# Altium PCB ArtFire.PcbDoc
Units mil, origin at the board's own origin, x right, y up, seen from the top; angles counter-clockwise.
Board outline 4250 x 3350 mil, 2 copper layers (Top Layer, Bottom Layer); 172 components, 120 nets, 589 pads, 1 vias.
Unrouted connection lines stored in the file: 371.
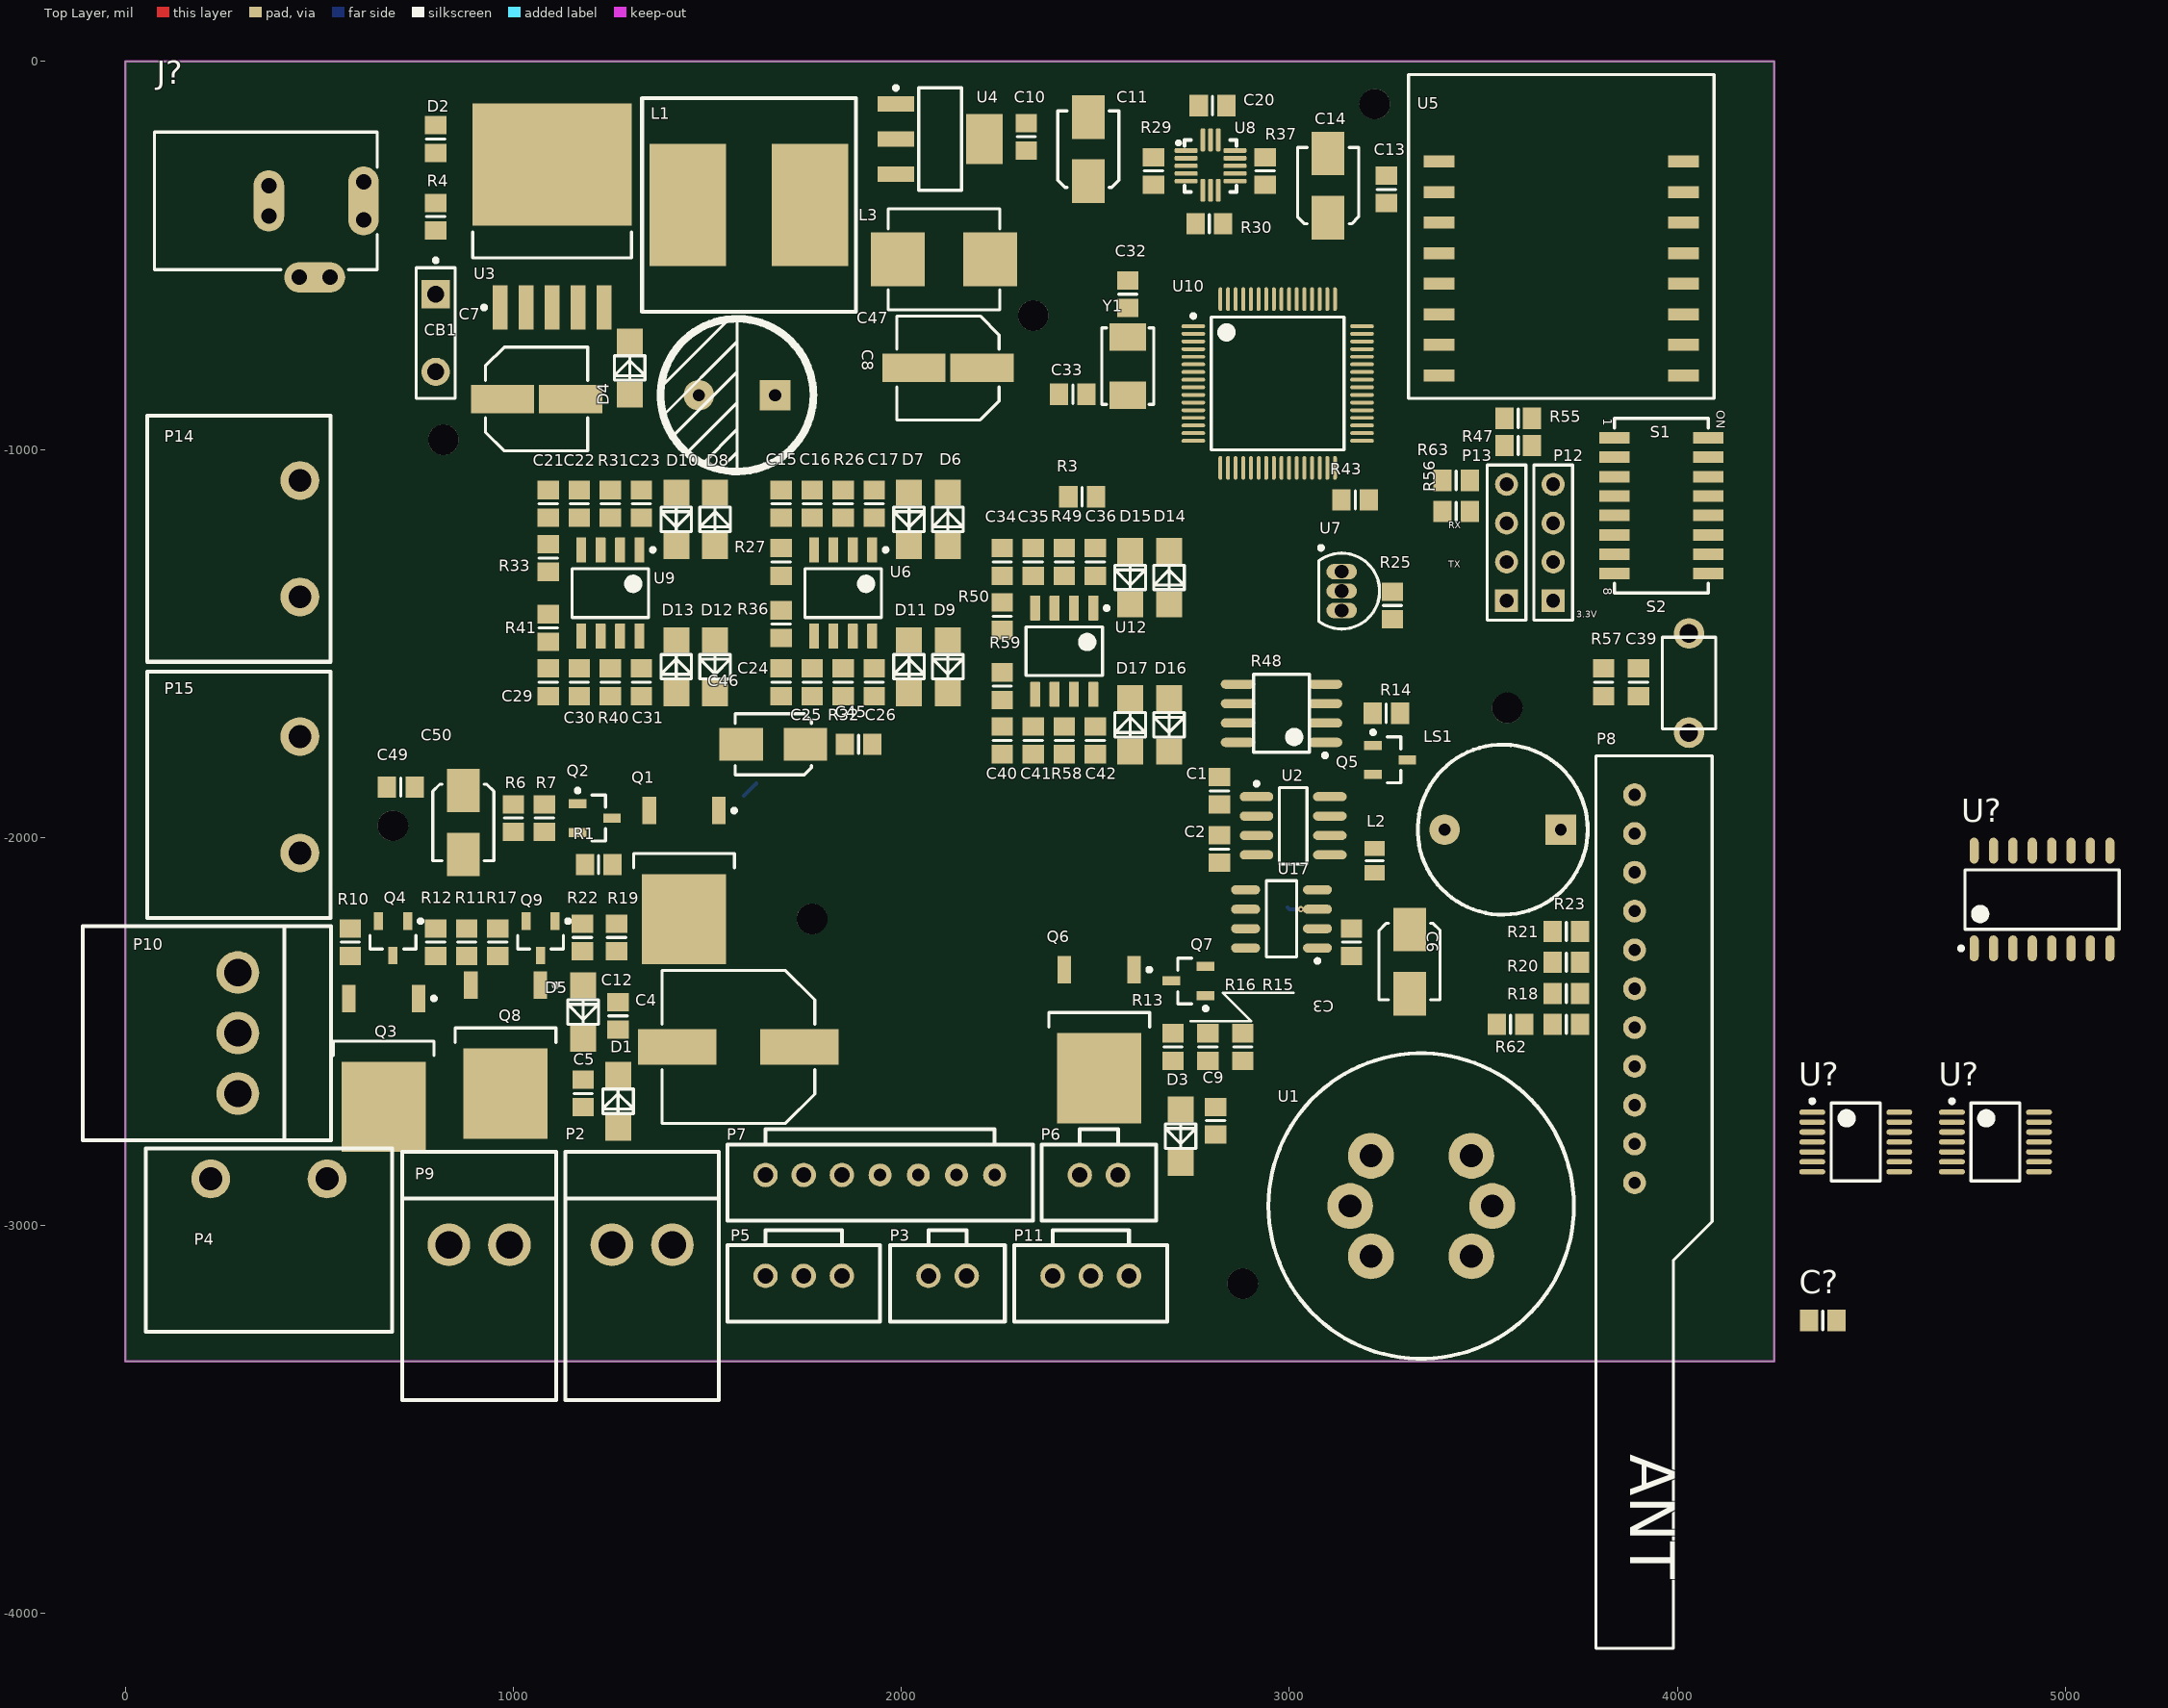
[diagram p0: Top Layer view]
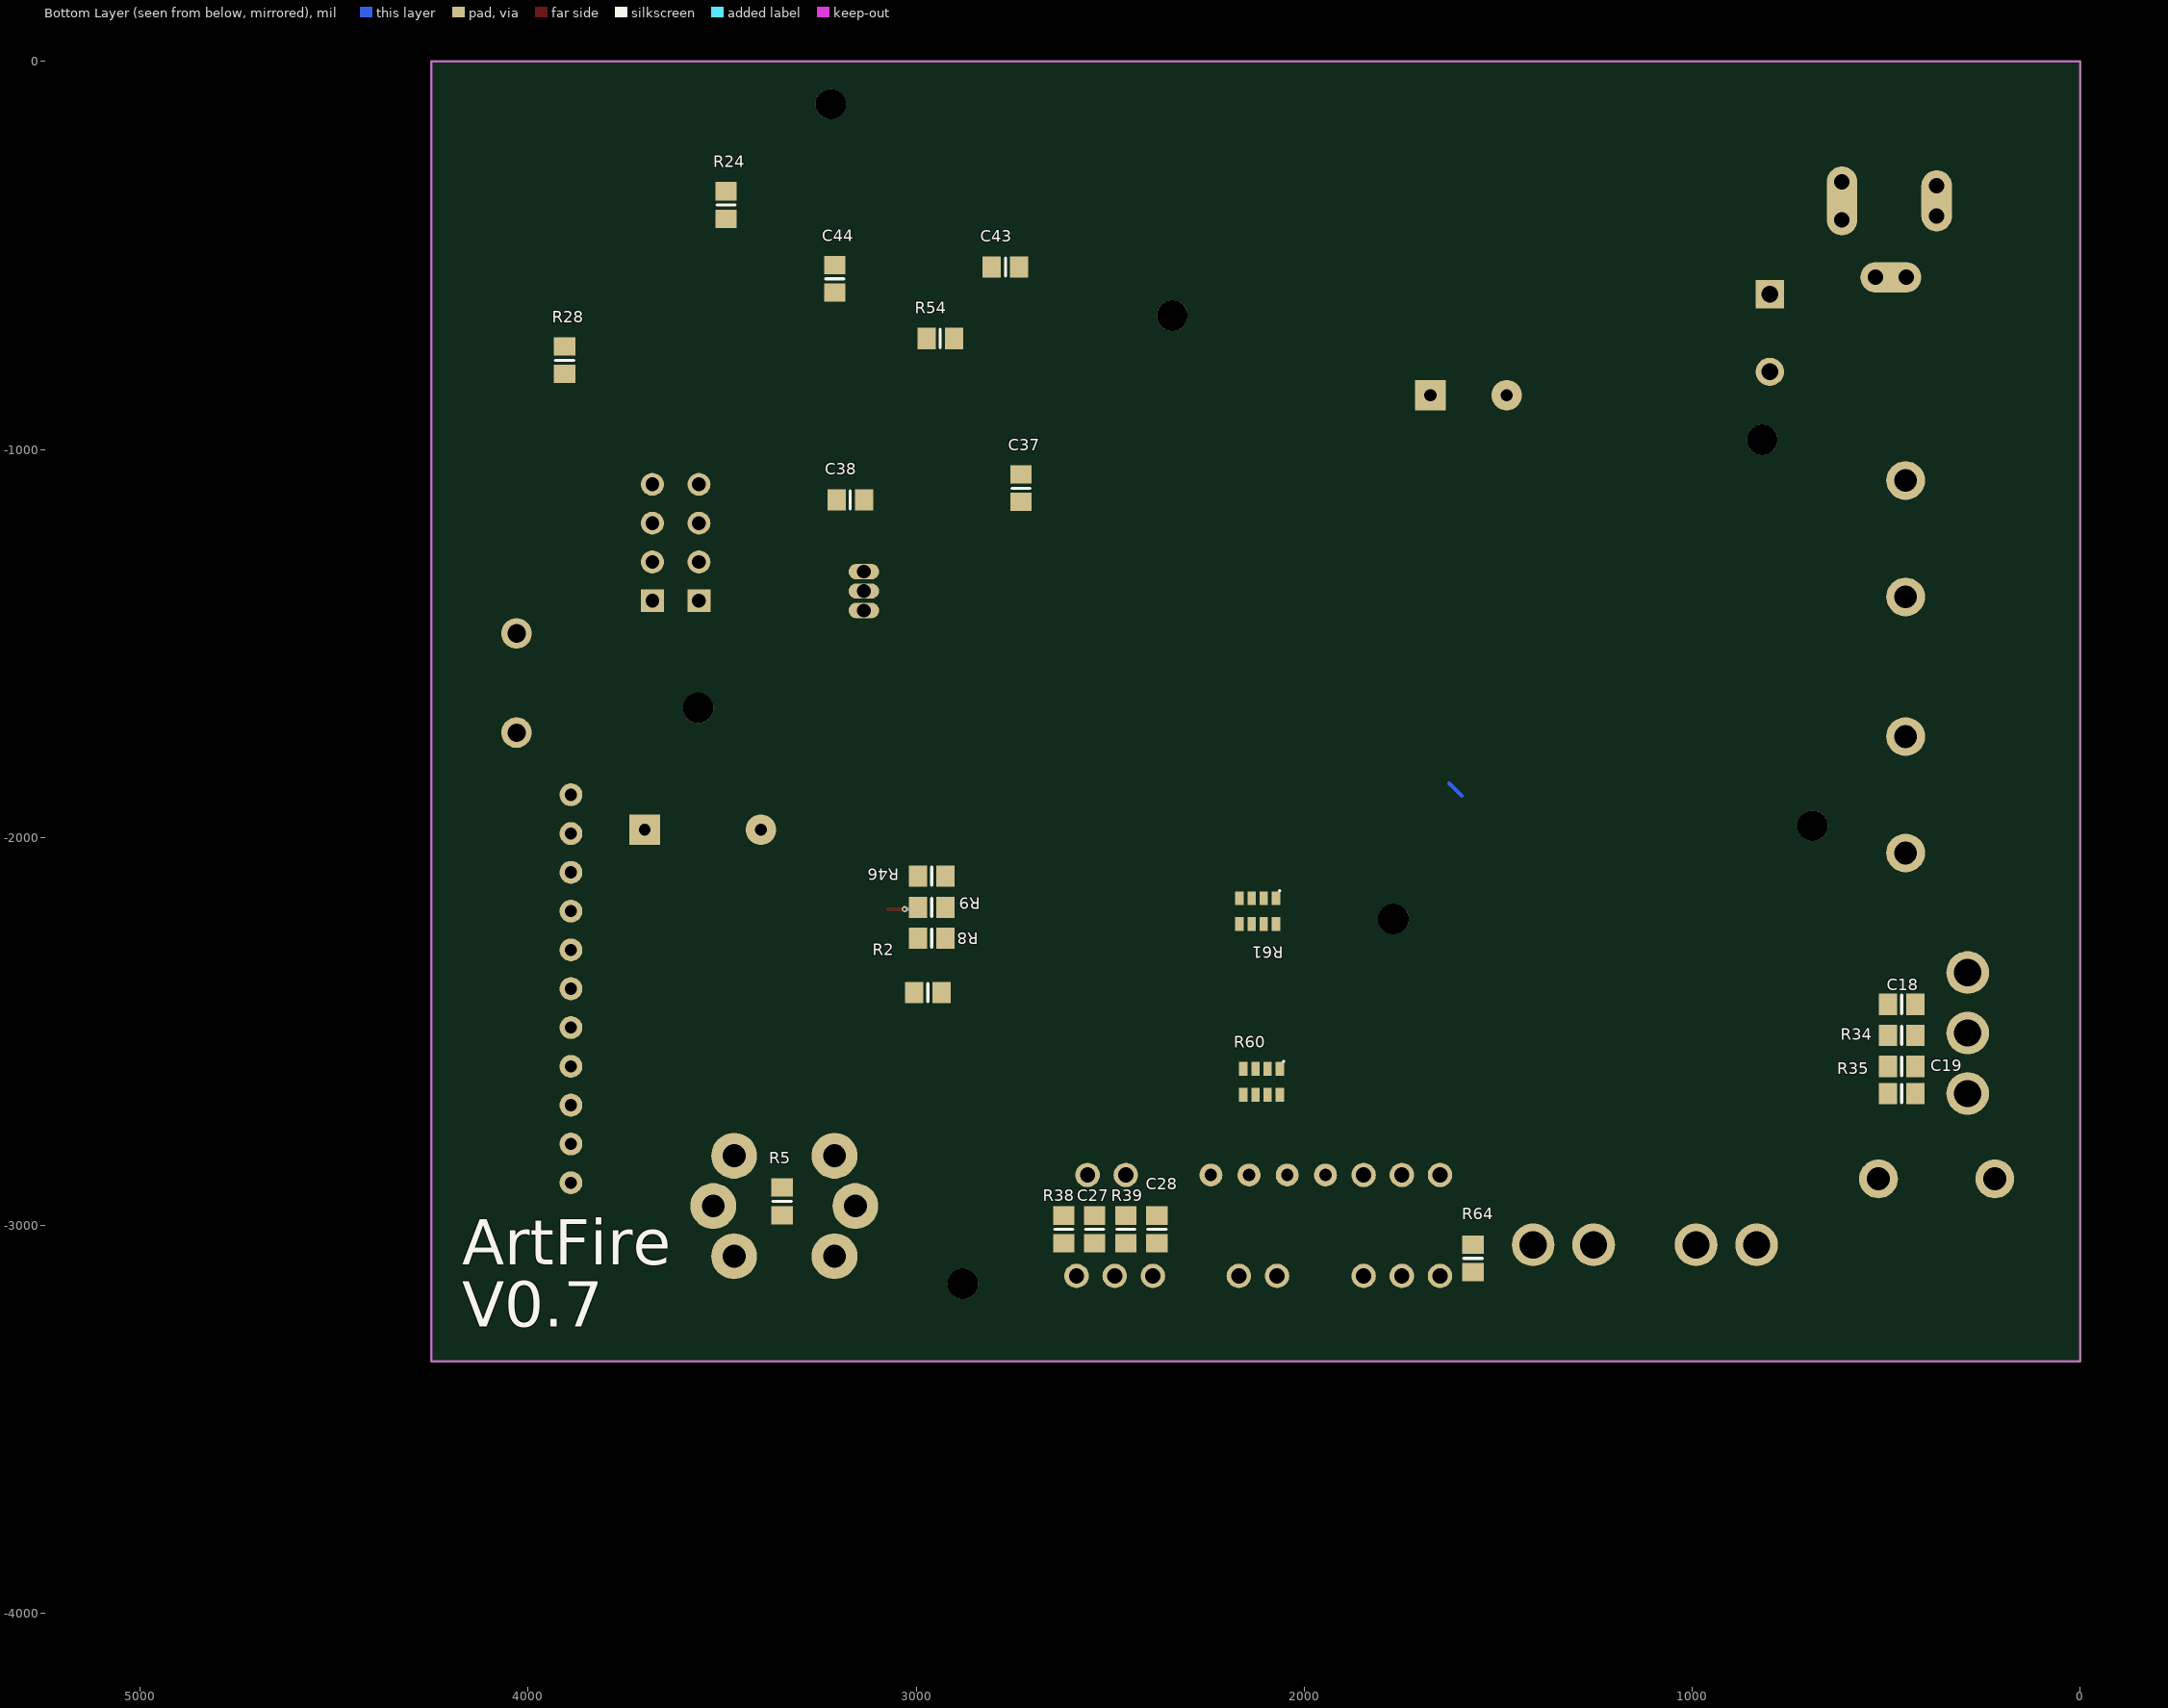
[diagram p1: Bottom Layer view, seen from below]

## Layer stack, top to bottom
Top Solder: solder mask 0.4, Solder Resist, Dk 3.5
Top Layer: signal copper 1.4
Dielectric 1: dielectric 12.6, FR-4, Dk 4.8
Bottom Layer: signal copper 1.4
Bottom Solder: solder mask 0.4, Solder Resist, Dk 3.5

## Board outline
0,-3350 0,0 4250,0 4250,-3350

## Design rules (kind name [scope] priority, off if disabled: settings)
Clearance [All] p1: gap=8 ignorepadtopadclearanceinfootprint=FALSE except(0: Arc-Hole Track-Hole SMDPad-Hole THPad-Hole Via-Hole Fill-Hole Poly-Hole Region-Hole Text-Hole)
MinimumSolderMaskSliver [All] p1: minsoldermaskwidth=0
PolygonConnect [All] p1: connectstyle=Relief reliefconductorwidth=10 reliefentries=4 polygonreliefangle="90 Angle" airgapwidth=10
RoutingVias [All] p1: holewidth=8 width=8 viastyle="Through Hole" minholewidth=8 minwidth=15 maxholewidth=100 maxwidth=1000
SilkToSilkClearance [All] p1: silktosilkclearance=0
SilkToSolderMaskClearance [IsPad] p1: minsilkscreentomaskgap=0 clearancetoexposedcopper=TRUE
SolderMaskExpansion [All] p1: expansion=4
Width [All] p1: maxlimit=1000 minlimit=8 preferedwidth=8
27 further rules are at their usual default settings.

## Components (designator, comment, footprint, x,y, rotation, side; value= is the part's Value field where it differs from the comment)
C1 "Cap Semi" 6-0805_N 2820,-1880 r270 top value=2.2uF
C2 "Cap Semi" 6-0805_N 2820,-2030 r90 top value=10uF
C3 "Cap Semi" 6-0805_N 3160,-2270 r90 top value=1uF
C4 "Cap Pol1" CAP_10*10MM 1580,-2540 r180 top value=1000uF
C5 "Cap Semi" 6-0805_N 1180,-2660 r270 top value=0.1uF
C6 "Cap Pol1" Cap_5*4mm 3310,-2320 r270 top value=10uF
C7 "Cap Pol1" CAP_6.3*5.4MM 1060,-870 r0 top value=100uF
C8 "Cap Pol1" CAP10_17 1675,-860 r180 top value=2200uF
C9 "Cap Semi" 6-0805_N 2810,-2730 r90 top value=0.1uF
C10 "Cap Semi" 6-0805_N 2322,-194 r90 top value=0.1uF
C11 "Cap Pol1" Cap_5*4mm 2482,-226 r90 top value=10uF
C12 "Cap Semi" 6-0805_N 1270,-2460 r90 top value=0.1uF
C13 "Cap Semi" 6-0805_N 3250,-330 r90 top value=0.1uF
C14 "Cap Pol1" Cap_5*4mm 3100,-320 r90 top value=10uF
C15 "Cap Semi" 6-0805_N 1690,-1140 r270 top value=0.1uF
C16 "Cap Semi" 6-0805_N 1770,-1140 r270 top value=0.1uF
C17 "Cap Semi" 6-0805_N 1930,-1140 r270 top value=0.1uF
C18 "Cap Semi" 6-0805_N 460,-2430 r180 bottom value=0.1uF
C19 "Cap Semi" 6-0805_N 460,-2660 r180 bottom value=0.1uF
C20 "Cap Semi" 6-0805_N 2802,-114 r180 top value=0.1uF
C21 "Cap Semi" 6-0805_N 1090,-1140 r270 top value=0.1uF
C22 "Cap Semi" 6-0805_N 1170,-1140 r270 top value=0.1uF
C23 "Cap Semi" 6-0805_N 1330,-1140 r270 top value=0.1uF
C24 "Cap Semi" 6-0805_N 1690,-1600 r90 top value=0.1uF
C25 "Cap Semi" 6-0805_N 1770,-1600 r90 top value=0.1uF
C26 "Cap Semi" 6-0805_N 1930,-1600 r90 top value=0.1uF
C27 "Cap Semi" 6-0805_N 2540,-3010 r90 bottom value=0.1uF
C28 "Cap Semi" 6-0805_N 2380,-3010 r90 bottom value=0.1uF
C29 "Cap Semi" 6-0805_N 1090,-1600 r90 top value=0.1uF
C30 "Cap Semi" 6-0805_N 1170,-1600 r90 top value=0.1uF
C31 "Cap Semi" 6-0805_N 1330,-1600 r90 top value=0.1uF
C32 "Cap Semi" 6-0805_N 2584,-600 r90 top value=22pF
C33 "Cap Semi" 6-0805_N 2442,-858 r180 top value=22pF
C34 "Cap Semi" 6-0805_N 2260,-1290 r270 top value=0.1uF
C35 "Cap Semi" 6-0805_N 2340,-1290 r270 top value=0.1uF
C36 "Cap Semi" 6-0805_N 2500,-1290 r270 top value=0.1uF
C37 "Cap Semi" 6-0805_N 2730,-1100 r270 bottom value=0.1uF
C38 "Cap Semi" 6-0805_N 3170,-1130 r0 bottom value=0.1uF
C39 "Cap Semi" 6-0805_N 3900,-1600 r90 top value=0.1uF
C40 "Cap Semi" 6-0805_N 2260,-1750 r90 top value=0.1uF
C41 "Cap Semi" 6-0805_N 2340,-1750 r90 top value=0.1uF
C42 "Cap Semi" 6-0805_N 2500,-1750 r90 top value=0.1uF
C43 "Cap Semi" 6-0805_N 2770,-530 r180 bottom value=0.1uF
C44 "Cap Semi" 6-0805_N 3210,-560 r90 bottom value=0.1uF
C45 "Cap Semi" 6-0805_N 1890,-1760 r0 top value=0.1uF
C46 "Cap Pol1" Cap_5*4mm 1670,-1760 r180 top value=10uF
C47 "Cap Pol1" CAP_6.3*5.4MM 2120,-790 r180 top value=100uF
C49 "Cap Semi" 6-0805_N 710,-1870 r180 top value=0.1uF
C50 "Cap Pol1" Cap_5*4mm 871.02,-1961.43 r270 top value=10uF
C? "Cap Semi" 6-0805_N 4375,-3245 r0 top value=10uF
CB1 "RF16700" SPST-2 800,-700 r270 top
D1 "Diode US1M" US1M 1270,-2680 r90 top
D2 "PWR" 6-0805_N 800,-200 r90 top
D3 "Diode US1M" US1M 2720,-2770 r270 top
D4 "1N5822" US1M 1300,-790 r90 top
D5 "Diode US1M" US1M 1180,-2450 r270 top
D6 "Diode US1M" US1M 2120,-1180 r90 top
D7 "Diode US1M" US1M 2020,-1180 r270 top
D8 "Diode US1M" US1M 1520,-1180 r90 top
D9 "Diode US1M" US1M 2120,-1560 r270 top
D10 "Diode US1M" US1M 1420,-1180 r270 top
D11 "Diode US1M" US1M 2020,-1560 r90 top
D12 "Diode US1M" US1M 1520,-1560 r270 top
D13 "Diode US1M" US1M 1420,-1560 r90 top
D14 "Diode US1M" US1M 2690,-1330 r90 top
D15 "Diode US1M" US1M 2590,-1330 r270 top
D16 "Diode US1M" US1M 2690,-1710 r270 top
D17 "Diode US1M" US1M 2590,-1710 r90 top
J? "PWR2.5" KLD-0202 74.72,-359.37 r0 top
L1 "Inductor" CDRH127 1450,-370 r0 top value=150uH
L2 "Inductor" 6-0805_L 3220,-2060 r270 top value=100uH
L3 "Inductor" IND_0630 2110,-510 r0 top value=22uH
LS1 "Buzzer" BUZZER 3550,-1980 r0 top
P2 "Pump2" CH3.96_2P 1410,-3050 r180 top
P3 "4R Speaker" XH2.54-2P 2070,-3130 r0 top
P4 "Fire_UP" KF7.62-2P 220,-2880 r0 top
P5 "Alcohol_Detect" XH2.54-3P 1650,-3130 r0 top
P6 "Fan" XH2.54-2P 2460,-2870 r0 top
P7 "XH2.54-7P" XH2.54-7P 1650,-2870 r0 top
P8 "Superheterodyne_Receiver" Sperheterodyne_Receiver 3890,-2890 r180 top
P9 "Pump_1" CH3.96_2P 990,-3050 r180 top
P10 "Fire_Detect" CH3.96_3P 290,-2660 r90 top
P11 "Leakage_Detect" XH2.54-3P 2390,-3130 r0 top
P12 "Debug_Port" HDR1X4 3680,-1390 r90 top
P13 "UART_Debug_Port" HDR1X4 3560,-1390 r90 top
P14 "thermoelectric_couple_f" KF7.62-2P 450,-1080 r270 top
P15 "thermoelectric_couple_t" KF7.62-2P 450,-1740 r270 top
Q1 "ADO484" DPAK_AOD484 1440,-2110 r270 top
Q2 "NPN" SOT-23_N 1210,-1950 r0 top
Q3 "ADO484" DPAK_AOD484 666,-2594 r270 top
Q4 "NPN" SOT-23_N 690,-2260 r270 top
Q5 "NPN" SOT-23_N 3260,-1800 r0 top
Q6 "ADO484" DPAK_AOD484 2510,-2520 r270 top
Q7 "NPN" SOT-23_N 2740,-2370 r180 top
Q8 "ADO484" DPAK_AOD484 980,-2560 r270 top
Q9 "NPN" SOT-23_N 1070,-2260 r270 top
R1 "Res3" 6-0805_N 1220,-2070 r0 top value=1K
R2 "Res3" 6-0805_N 2970,-2400 r0 bottom value=1K
R3 "Res3" 6-0805_N 2466,-1122 r0 top value=0R
R4 "Res" 6-0805_N 800,-400 r270 top value=10K
R5 "Res3" 6-0805_N 3346,-2938 r270 bottom value=5K
R6 "Res3" 6-0805_N 1000,-1950 r90 top value=10K
R7 "Res3" 6-0805_N 1080,-1950 r90 top value=4.7K
R8 "Res3" 6-0805_N 2960,-2260 r0 bottom value=1K
R9 "Res3" 6-0805_N 2960,-2180 r0 bottom value=150K
R10 "Res3" 6-0805_N 580,-2270 r270 top value=1K
R11 "Res3" 6-0805_N 880,-2270 r90 top value=10K
R12 "Res3" 6-0805_N 800,-2270 r90 top value=4.7K
R13 "Res3" 6-0805_N 2700,-2540 r90 top value=1K
R14 "Res3" 6-0805_N 3250,-1680 r180 top value=500R
R15 "Res3" 6-0805_N 2880,-2540 r90 top value=10K
R16 "Res3" 6-0805_N 2790,-2540 r90 top value=4.7K
R17 "Res3" 6-0805_N 960,-2270 r270 top value=1K
R18 "Res3" 6-0805_N 3714,-2482 r180 top value=1K
R19 "Res3" 6-0805_N 1266,-2258 r90 top value=10K
R20 "Res3" 6-0805_N 3714,-2402 r180 top value=1K
R21 "Res3" 6-0805_N 3714,-2322 r180 top value=1K
R22 "Res3" 6-0805_N 1178,-2258 r90 top value=4.7K
R23 "Res3" 6-0805_N 3714,-2242 r180 top value=1K
R24 "Res3" 6-0805_N 3490,-370 r90 bottom value=1K
R25 "Res3" 6-0805_N 3266,-1402 r270 top value=4.7K
R26 "Res3" 6-0805_N 1850,-1140 r270 top value=470R
R27 "Res3" 6-0805_N 1690,-1290 r90 top value=1kR
R28 "Res3" 6-0805_N 3906,-770 r270 bottom value=1K
R29 "Res3" 6-0805_N 2650,-282 r90 top value=4.7K
R30 "Res3" 6-0805_N 2794,-418 r0 top value=4.7K
R31 "Res3" 6-0805_N 1250,-1140 r270 top value=470R
R32 "Res3" 6-0805_N 1850,-1600 r90 top value=470R
R33 "Res3" 6-0805_N 1090,-1280 r90 top value=1kR
R34 "Res3" 6-0805_N 460,-2510 r180 bottom value=500K
R35 "Res3" 6-0805_N 460,-2590 r180 bottom value=500K
R36 "Res3" 6-0805_N 1690,-1450 r270 top value=1kR
R37 "Res3" 6-0805_N 2938,-282 r270 top value=1K
R38 "Res3" 6-0805_N 2620,-3010 r90 bottom value=500K
R39 "Res3" 6-0805_N 2460,-3010 r90 bottom value=500K
R40 "Res3" 6-0805_N 1250,-1600 r90 top value=470R
R41 "Res3" 6-0805_N 1090,-1460 r270 top value=1kR
R43 "Res3" 6-0805_N 3170,-1130 r180 top value=100k
R46 "Res3" 6-0805_N 2960,-2100 r0 bottom value=150K
R47 "Res3" 6-0805_N 3590,-990 r180 top value=1k
R48 "AT24C02" SOP8_TDA2822 2980,-1680 r180 top
R49 "Res3" 6-0805_N 2420,-1290 r270 top value=470R
R50 "Res3" 6-0805_N 2260,-1430 r90 top value=1kR
R54 "Res3" 6-0805_N 2938,-714 r180 bottom value=100k
R55 "Res3" 6-0805_N 3590,-920 r180 top value=1k
R56 "Res3" 6-0805_N 3430,-1160 r180 top value=0R
R57 "Res3" 6-0805_N 3810,-1600 r90 top value=10k
R58 "Res3" 6-0805_N 2420,-1750 r90 top value=470R
R59 "Res3" 6-0805_N 2260,-1610 r270 top value=1kR
R60 "Res_Pack_100R" Res_Pack_0603 2110,-2630 r270 bottom
R61 "Res_Pack_100R" Res_Pack_0603 2120,-2190 r270 bottom
R62 "Res3" 6-0805_N 3570,-2482 r180 top value=1K
R63 "Res3" 6-0805_N 3430,-1080 r180 top value=1k
R64 "Res3" 6-0805_N 1565,-3085 r270 bottom value=0R
S1 "SW DIP-8" DHN(F)_8Pin 4080,-970 r270 top
S2 "Reset" SWP_PB_6.5mm 4030,-1730 r90 top
U1 "MQ_Alcohol" MQ 3340,-2950 r0 top
U2 "M62429" SO8_N 3010,-1970 r0 top
U3 "LM2576SX-5.0" TS5B_L 1100,-400 r90 top
U4 "AMS1117" SOT223_N 2100,-200 r0 top
U5 "ESP-07" ESP-07_Wifi 3386,-258 r0 top
U6 "LM2904M" D0008A_M 1850,-1370 r270 top
U7 "DS18B20" TO-92A 3135,-1365 r180 top
U8 "MMA8452Q" QFN-16 2738,-210 r0 top
U9 "LM2904M" D0008A_M 1250,-1370 r270 top
U10 "STM32F103RCT6" LQFP64_L 2970,-830 r0 top
U12 "LM2904M" D0008A_M 2420,-1520 r270 top
U17 "CS8508E" SO8_L 2980,-2210 r180 top
U? "INA2332AIPWRG4" TI-PW14_N 4820,-2785 r0 top
U? "TLP281-4GB" SOIC127P690X200-16N 4940,-2160 r90 top
U? "INA2332AIPWRG4" TI-PW14_N 4460,-2785 r0 top
Y1 "XTAL" OSC_5032_2Pin 2584,-860 r90 top

## Footprints (in the part's own frame and the unit in brackets; to place one, negate y for a bottom-side part, rotate by r counter-clockwise, add the part's x,y. Pads: shape width x height; smd on the part's side, far side on the other; paste and mask are expansions set on the pad)
6-0805_L [mm] "Chip Resistor, Body 2.0x1.2mm, IPC High Density"
  rect 1x1.3 smd: 1(-0.8,0) 2(0.8,0)
  silkscreen extent 0,-0.55 0,0.55, body extent -1.07,-0.7 1.07,0.7, height 0.7
6-0805_N [mm] "Chip Resistor, Body 2.0x1.2mm, IPC Medium Density"
  rect 1.2x1.4 smd: 1(-0.9,0) 2(0.9,0)
  silkscreen extent 0,-0.6 0,0.6, body extent -1.07,-0.7 1.07,0.7, height 0.7
BUZZER [mm]
  rect 2x2 hole 0.762: 1(3.8,0)
  round 2 hole 0.762: 2(-3.8,0)
  silkscreen extent -5.56,-5.57 5.57,5.57
CAP10_17 [mm]
  rect 2x2 hole 0.8: 1(0,0)
  round 2 hole 0.8: 2(5,0)
  silkscreen extent -2.5,-5 7.5,5
Cap_5*4mm [mm]
  rect 2.85x2.15 smd: 1(-2.1,0) 2(2.1,0)
  silkscreen extent -2.5,-2 2.5,2, body extent -2.5,-2 2.5,2, height 6
CAP_6.3*5.4MM [mm] "Aluminum Electrolytic Capacitor, Body 6.50x6.60x5.40mm, IPC Low Density"
  rect 4.15x1.85 smd: 1(-2.225,0) 2(2.225,0)
  silkscreen extent -3.35,-3.4 3.35,3.4, body extent -3.35,-3.4 3.35,3.4, height 5.4
CAP_10*10MM [mm]
  rect 5.15x2.35 smd: 1(-4,0) 2(4,0)
  silkscreen extent -5,-5 5,5, body extent -5,-5 5,5, height 10
CDRH127 [mm]
  rect 5x8 smd: 1(0,0) 2(8,0)
  silkscreen extent -3,-7 11,7
CH3.96_2P [mil]
  round 110 hole 70: 1(0,0) 2(155.91,0)
  silkscreen extent -120,-240 276,400
CH3.96_3P [mil]
  round 110 hole 70: 1(0,0) 2(155.91,0) 3(311.81,0)
  silkscreen extent -120,-240 432,400
D0008A_M [mm] "SOIC, 8-Leads, Body 5x4mm, Pitch 1.27mm, IPC Low Density"
  rrect15% 1.65x0.65 smd: 1(-2.825,1.905) 2(-2.825,0.635) 3(-2.825,-0.635) 4(-2.825,-1.905) 5(2.825,-1.905) 6(2.825,-0.635) 7(2.825,0.635) 8(2.825,1.905)
  silkscreen extent -2.95,-2.5 1.6,2.91, body extent -3,-2.45 3,2.45, height 1.63
DHN(F)_8Pin [mm]
  rect 0.76x2 smd: 1(0,-6.15) 2(1.27,-6.15) 3(2.54,-6.15) 4(3.81,-6.15) 5(5.08,-6.15) 6(6.35,-6.15) 7(7.62,-6.15) 8(8.89,-6.15) 9(8.89,0) 10(7.62,0) 11(6.35,0) 12(5.08,0) 13(3.81,0) 14(2.54,0) 15(1.27,0) 16(0,0)
  silkscreen extent -1.27,-6.15 10.16,0
DPAK_AOD484 [mm] "D-PAK, 3-Pads, Body 5.95x6.66mm (max), IPC Medium Density"
  rect 1.8x0.9 smd: 1(-4.55,2.28) 3(-4.55,-2.28)
  rect 5.9x5.5 smd: 2(2.55,0)
  silkscreen extent -4.67,-3.3 -0.8,3.41, body extent -1.75,-3.3 3.95,3.3, height 2.38
ESP-07_Wifi [mm]
  rect 2x0.8 smd: 1(0,0) 2(0,-2) 3(0,-4) 4(0,-6) 5(0,-8) 6(0,-10) 7(0,-12) 8(0,-14) 9(16,-14) 10(16,-12) 11(16,-10) 12(16,-8) 13(16,-6) 14(16,-4) 15(16,-2) 16(16,0)
  silkscreen extent -2,-15.5 18,5.7
HDR1X4 [mm] "Connector; Header; 4 Position"
  rect 1.5x1.5 hole 0.9: 1(0,0)
  round 1.5 hole 0.9: 2(2.54,0) 3(5.08,0) 4(7.62,0)
  silkscreen extent -1.27,-1.27 8.89,1.27
IND_0630 [mm] "PowerInductor"
  rect 3.5x3.5 smd: 1(-3.025,0) 2(3.025,0)
  silkscreen extent -3.65,-3.3 3.65,3.3
KF7.62-2P [mm] "KF7.62-2P"
  round 2.54 hole 1.5: 1(0,0) 2(7.62,0)
  silkscreen extent -4.25,-10 11.87,2
KLD-0202 [mm] "DC Power Jack, 2.5mm, KLD Series, PCB Mount"
  oval 2x4.5 all layers, no hole: 1(13.7,0)
  round 1.5 hole 1: 1A(13.7,-1.25) 1B(13.7,1.25) 2A(7.5,-1) 2B(7.5,1) 3A(9.5,-5) 3B(11.5,-5)
  oval 2x4 all layers, no hole: 2(7.5,0)
  oval 4x2 all layers, no hole: 3(10.5,-5)
  silkscreen extent 0,-4.5 14.6,4.5
LQFP64_L [mm] "Thin QFP, 64-Leads, Body 10x10mm, Pitch 0.5mm, IPC High Density"
  oval 1.55x0.25 smd: 1(-5.525,3.75) 2(-5.525,3.25) 3(-5.525,2.75) 4(-5.525,2.25) 5(-5.525,1.75) 6(-5.525,1.25) 7(-5.525,0.75) 8(-5.525,0.25) 9(-5.525,-0.25) 10(-5.525,-0.75) 11(-5.525,-1.25) 12(-5.525,-1.75) 13(-5.525,-2.25) 14(-5.525,-2.75) 15(-5.525,-3.25) 16(-5.525,-3.75) 33(5.525,-3.75) 34(5.525,-3.25) 35(5.525,-2.75) 36(5.525,-2.25) 37(5.525,-1.75) 38(5.525,-1.25) 39(5.525,-0.75) 40(5.525,-0.25) 41(5.525,0.25) 42(5.525,0.75) 43(5.525,1.25) 44(5.525,1.75) 45(5.525,2.25) 46(5.525,2.75) 47(5.525,3.25) 48(5.525,3.75)
  oval 0.25x1.55 smd: 17(-3.75,-5.525) 18(-3.25,-5.525) 19(-2.75,-5.525) 20(-2.25,-5.525) 21(-1.75,-5.525) 22(-1.25,-5.525) 23(-0.75,-5.525) 24(-0.25,-5.525) 25(0.25,-5.525) 26(0.75,-5.525) 27(1.25,-5.525) 28(1.75,-5.525) 29(2.25,-5.525) 30(2.75,-5.525) 31(3.25,-5.525) 32(3.75,-5.525) 49(3.75,5.525) 50(3.25,5.525) 51(2.75,5.525) 52(2.25,5.525) 53(1.75,5.525) 54(1.25,5.525) 55(0.75,5.525) 56(0.25,5.525) 57(-0.25,5.525) 58(-0.75,5.525) 59(-1.25,5.525) 60(-1.75,5.525) 61(-2.25,5.525) 62(-2.75,5.525) 63(-3.25,5.525) 64(-3.75,5.525)
  silkscreen extent -5.65,-4.35 4.35,4.55, body extent -5,-5 5,5, height 1.6
MQ [mm]
  round 3 hole 1.5: 1(-3.288,3.288) 2(-4.65,0) 3(-3.288,-3.288) 4(3.288,-3.288) 5(4.65,0) 6(3.288,3.288)
  silkscreen extent -10,-10 10,10
OSC_5032_2Pin [mm]
  rect 1.8x2.4 smd: 1(0,0) 2(3.8,0)
  silkscreen extent -0.6,-1.7 4.4,1.7
QFN-16 [mm] "MMA8452Q"
  rrect50% 1.5x0.3 smd: 1(-0.1,-0.5) 2(-0.1,-1) 3(-0.1,-1.5) 4(-0.1,-2) 5(-0.1,-2.5) 9(3.1,-2.5) 10(3.1,-2) 11(3.1,-1.5) 12(3.1,-1) 13(3.1,-0.5)
  rrect50% 0.3x1.5 smd: 6(1,-3.1) 7(1.5,-3.1) 8(2,-3.1) 14(2,0.2) 15(1.5,0.2) 16(1,0.2)
  silkscreen extent -0.7,-3.2 3.2,0.2
Res_Pack_0603 [mm] "Chip Array, ConvexE, 8-Leads, Pitch 0.80mm,  Body 3.20x1.50mm,  IPC Medium Density"
  rect 0.9x0.55 smd: 1(-0.85,1.2) 2(-0.85,0.4) 3(-0.85,-0.4) 4(-0.85,-1.2) 5(0.85,-1.2) 6(0.85,-0.4) 7(0.85,0.4) 8(0.85,1.2)
  silkscreen extent -1.39,1.39 -1.29,1.49, body extent -0.82,-1.68 0.82,1.68, height 0.6
SO8_L [mm] "SOIC, 8-Leads, Body 4.9x3.9mm, Pitch 1.27mm, IPC High Density"
  oval 1.9x0.6 smd: 1(-2.35,1.905) 2(-2.35,0.635) 3(-2.35,-0.635) 4(-2.35,-1.905) 5(2.35,-1.905) 6(2.35,-0.635) 7(2.35,0.635) 8(2.35,1.905)
  silkscreen extent -2.48,-2.5 1,2.88, body extent -2,-2.5 2,2.5, height 1.75
SO8_N [mm] "SOIC, 8-Leads, Body 4.9x3.9mm, Pitch 1.27mm, IPC Medium Density"
  oval 2.2x0.6 smd: 1(-2.4,1.905) 2(-2.4,0.635) 3(-2.4,-0.635) 4(-2.4,-1.905) 5(2.4,-1.905) 6(2.4,-0.635) 7(2.4,0.635) 8(2.4,1.905)
  silkscreen extent -2.52,-2.5 0.9,2.88, body extent -2,-2.5 2,2.5, height 1.75
SOIC127P690X200-16N [mm] "SOIC, TLP281-4GB"
  oval 1.7x0.6 smd: 1(-3.2,4.445) 2(-3.2,3.175) 3(-3.2,1.905) 4(-3.2,0.635) 5(-3.2,-0.635) 6(-3.2,-1.905) 7(-3.2,-3.175) 8(-3.2,-4.445) 9(3.2,-4.445) 10(3.2,-3.175) 11(3.2,-1.905) 12(3.2,-0.635) 13(3.2,0.635) 14(3.2,1.905) 15(3.2,3.175) 16(3.2,4.445)
  silkscreen extent -3.32,-5.05 1.95,5.42, body extent -2.35,-5.05 2.35,5.05, height 2
SOP8_TDA2822 [mm] "TSOP, 8-Leads, Body 5.00x3.95mm, Pitch 1.27mm, IPC Medium Density"
  oval 2.25x0.6 smd: 1(-2.85,1.905) 2(-2.85,0.635) 3(-2.85,-0.635) 4(-2.85,-1.905) 5(2.85,-1.905) 6(2.85,-0.635) 7(2.85,0.635) 8(2.85,1.905)
  silkscreen extent -2.98,-2.55 1.83,2.88, body extent -2,-2.55 2,2.55, height 1.55
SOT223_N [mm] "SOT223, 4-Leads, Body 6.5x3.5mm, Pitch 2.3mm, Lead Span 7mm, IPC Medium Density"
  rect 2.4x1 smd: 1(-2.9,2.3) 2(-2.9,0) 3(-2.9,-2.3)
  rect 2.4x3.3 smd: 4(2.9,0)
  silkscreen extent -3.02,-3.35 1.4,3.47, body extent -1.85,-3.35 1.85,3.35, height 1.7
SOT-23_N [mm] "SOT23, 3-Leads, Body 2.9x1.3mm, Pitch 0.95mm, Lead Span 2.5mm, IPC Medium Density"
  rect 1.15x0.6 smd: 1(-1.125,0.95) 2(-1.125,-0.95) 3(1.125,0)
  silkscreen extent -1.25,-1.5 0.7,1.92, body extent -0.7,-1.5 0.7,1.5, height 1.1
Sperheterodyne_Receiver [mm]
  round 1.5 hole 0.8: 1(0,0) 2(0,-2.54) 3(0,-5.08) 4(0,-7.62) 5(0,-10.16) 6(0,-12.7) 7(0,-15.24) 8(0,-17.78) 9(0,-20.32) 10(0,-22.86) 11(0,-25.4)
  silkscreen extent -5.08,-27.94 2.54,30.48
SPST-2 [mm] "Switch; 2 Leads"
  rect 1.85x1.85 hole 1.1: 1(-2.54,0)
  round 1.85 hole 1.1: 2(2.54,0)
  silkscreen extent -4.89,-1.27 4.28,1.27
SWP_PB_6.5mm [mm]
  round 2 hole 1.2: 1(0,0) 2(6.5,0)
  silkscreen extent 0.25,-1.75 6.25,1.75
TI-PW14_N [mm] "SOP, 14-Leads, Body 5.1x4.5mm, Pitch 0.65mm, IPC Medium Density"
  oval 1.7x0.35 smd: 1(-2.85,1.95) 2(-2.85,1.3) 3(-2.85,0.65) 4(-2.85,0) 5(-2.85,-0.65) 6(-2.85,-1.3) 7(-2.85,-1.95) 8(2.85,-1.95) 9(2.85,-1.3) 10(2.85,-0.65) 11(2.85,0) 12(2.85,0.65) 13(2.85,1.3) 14(2.85,1.95)
  silkscreen extent -2.97,-2.55 1.6,2.8, body extent -2.25,-2.55 2.25,2.55, height 1.2
TO-92A [mm] "TO, Flat Index; 3 In-Line, Axial Leads; Body Dia. 4.5mm; Leads 0.51 x 0.48 mm (max)"
  oval 2x1 hole 0.9: 1(0,-1.27) 2(0,0) 3(0,1.27)
  silkscreen extent -2.48,-2.95 1.5,2.48, body extent -2.48,-2.5 1.5,2.5, height 6.86
TS5B_L [mm] "D2-PAK, 6-Leads, Body 8.6x10.2mm, Pitch 1.7mm, Lead Span 14.1mm, IPC High Density"
  rect 2.9x1 smd: 1(-5.95,3.4) 2(-5.95,1.7) 3(-5.95,0) 4(-5.95,-1.7) 5(-5.95,-3.4)
  rect 8x10.4 smd: 6(3.4,0)
  silkscreen extent -6.07,-5.2 -1,5.2, body extent -2.7,-5.2 6.19,5.2, height 4.65
US1M [mm]
  rect 1.7x1.7 smd: 1(-1.74,0) 2(1.74,0)
  silkscreen extent -0.8,-1 0.8,1
XH2.54-2P [mm]
  round 1.6 hole 1: 1(0,0) 2(2.5,0)
  silkscreen extent -2.5,-3 5,3
XH2.54-3P [mm]
  round 1.6 hole 1: 1(0,0) 2(2.5,0) 3(5,0)
  silkscreen extent -2.5,-3 7.5,3
XH2.54-7P [mm]
  round 1.6 hole 1: 1(0,0) 2(2.5,0) 3(5,0)
  round 1.5 hole 0.8: 4(7.5,0) 5(10,0) 6(12.5,0) 7(15,0)
  silkscreen extent -2.5,-3 17.5,3

## Part data
C1 C2 C3 C5 C9 C10 C12 C13 C15 C16 C17 C18 C19 C20 C21 C22 C23 C24 C25 C26 C27 C28 C29 C30 C31 C32 C33 C34 C35 C36 C37 C38 C39 C40 C41 C42 C43 C44 C45 C49 C?: "Capacitor (Semiconductor SIM Model)", LatestRevisionDate=29-May-2009, LatestRevisionNote="IPC-7351 Footprint Added.", PackageDescription="Chip Capacitor", PackageReference=C1206, Published=8-Jun-2000, Publisher="Altium Limited"
C4 C6 C7 C8 C11 C14 C46 C47 C50: "Polarized Capacitor (Radial)", LatestRevisionDate=17-Jul-2002, LatestRevisionNote="Re-released for DXP Platform.", PackageDescription="Polarized Capacitor (Radial); 2 Leads", PackageReference=RB7.6-15, Published=8-Jun-2000, Publisher="Altium Limited"
CB1: library part "Circuit Breaker", "Circuit Breaker", LatestRevisionDate=17-Jul-2002, LatestRevisionNote="Re-released for DXP Platform.", PackageDescription="Switch; 2 Leads", PackageReference=SPST-2, Published=24-Mar-1999, Publisher="Altium Limited"
D1 D3 D4 D5 D6 D7 D8 D9 D10 D11 D12 D13 D14 D15 D16 D17: library part "Diode BAT17", "Silicon RF Schottky Diode for Mixer Applications in the VHF/UHF Range", ComponentLink1Description="Manufacturer Link", ComponentLink1URL=http://www.infineon.com/, ComponentLink2Description=Datasheet, ComponentLink2URL=http://www.infineon.com/upload/Document/cmc_upload/documents/009/363/bat17series.pdf, DatasheetVersion=Oct-1999, LatestRevisionDate=29-May-2009, LatestRevisionNote="IPC-7351 Footprint Added.", Note="Pin 2 is not connected and not drawn.", PackageDescription="3-Pin SOT-23 Package 0.95 mm Pitch, 2.5 mm Lead Span", PackageReference=SOT-23, PackageVersion=Sep-2001, Published=21-Mar-2003, Publisher="Altium Limited"
D2: library part LED0, "Typical INFRARED GaAs LED", LatestRevisionDate=08-Jul-2005, LatestRevisionNote="Mech Layer 1 removed.", PackageDescription="LED; 2 Leads", PackageReference=LED-0, Published=8-Jun-2000, Publisher="Altium Limited"
J?: "Low Voltage Power Supply Connector", ComponentLink1Description="Manufacturer Link", ComponentLink1URL=http://domino.kycon.com/internet/Products.html, DatasheetDocument=09-May-2002, Published=17-Dec-2003, Publisher="Altium Limited"
LS1: "Magnetic Transducer Buzzer", ComponentLink1Description="Manufacturer Link", ComponentLink1URL=http://www.megastar.com/linecard/buzzmode/index.php, DatasheetVersion=17-Dec-2003, LatestRevisionDate=17-Dec-2003, LatestRevisionNote="Schematic revised, PCB Footprint replaced.", PackageDescription="Magnetic Transducer Buzzer", PackageReference=ABSM-1574, Published=24-Mar-1999, Publisher="Altium Limited"
P2 P9: library part CH3.96_2P
P3 P6: library part XH2.54-2P
P4 P14 P15: library part KF3.96
P5 P11: library part XH2.54-3P
P10: library part CH3.96_3P
P12 P13: library part "Header 4", "Header, 4-Pin", LatestRevisionDate=17-Jul-2002, LatestRevisionNote="Re-released for DXP Platform.", Publisher="Altium Limited"
Q1 Q3 Q6 Q8: library part NMOS-2, "N-Channel Power MOSFET", ComponentLink1Description="Manufacturer Link", ComponentLink1URL=http://www.irf.com/, DatasheetVersion=PD-9.814, LatestRevisionDate=17-Jul-2002, LatestRevisionNote="Re-released for DXP Platform.", Note="Pin 2 is electrically connected to pin 4.", PackageDescription="TO, Thru-Hole, Vertical, Heatsink Mounted; 3 In-Line Leads; Pitch 2.54 mm", PackageReference=TO-220AB, PackageVersion=Feb-1997, Published=8-Jun-2000, Publisher="Altium Limited"
Q2 Q4 Q5 Q7 Q9: "NPN Bipolar Transistor", Code_JEDEC=TO-226-AA, LatestRevisionDate=17-Jul-2002, LatestRevisionNote="Re-released for DXP Platform.", PackageDescription="TO, Flat Index; 3 In-Line, Axial Leads; Body Dia. 4.8mm; Leads 0.55 x 0.51 mm (max)", PackageReference=TO-226-AA, Published=8-Jun-2000, Publisher="Altium Limited"
R1 R2 R3 R5 R6 R7 R8 R9 R10 R11 R12 R13 R14 R15 R16 R17 R18 R19 R20 R21 R22 R23 R24 R25 R26 R27 R28 R29 R30 R31 R32 R33 R34 R35 R36 R37 R38 R39 R40 R41 R43 R46 R47 R49 R50 R54 R55 R56 R57 R58 R59 R62 R63 R64: "Resistor", LatestRevisionDate=29-May-2009, LatestRevisionNote="IPC-7351 Footprint Added.", PackageDescription="Chip Resistor", PackageReference=J1-0603, Published=8-Jun-2000, Publisher="Altium Limited"
R4: library part Res1, "Resistor", LatestRevisionDate=17-Jul-2002, LatestRevisionNote="Re-released for DXP Platform.", PackageDescription="Axial Device, Thru-Hole; 2 Leads; 0.3 in Pin Spacing", PackageReference=AXIAL-0.3, Published=8-Jun-2000, Publisher="Altium Limited"
R60 R61: library part Res_Pack_4, "Res_Pack_4"
S1: "DIP Switch, 8 Position, SPST", LatestRevisionDate=17-Jul-2002, LatestRevisionNote="Re-released for DXP Platform.", PackageDescription="DIP Switch; 16 Leads", PackageReference=DIP_SW_8WAY_SMD, Published=24-Mar-1999, Publisher="Altium Limited"
S2: library part SW-PB, "Switch", LatestRevisionDate=17-Jul-2002, LatestRevisionNote="Re-released for DXP Platform.", PackageDescription="Switch; 2 Leads", PackageReference=SPST-2, Published=24-Mar-1999, Publisher="Altium Limited"
U1: library part MQ
U2: "Digital Adjust Res"
U3: library part CMP-0069-00116-2, "SIMPLE SWITCHER? 3A Step-Down Voltage Regulator, 5-pin TO-263", Manufacturer="National Semiconductor", PackageTopMarking="NSUZXYTTE#*LM2576S*-5.0 P+", PowerWise=N, Code_JEDEC=MO-169-AB, ComponentLink1Description="LM2576 Datasheet", ComponentLink1URL=http://www.national.com/ds/LM/LM2576.pdf, ComponentLink2Description="LM2576 Web Page", ComponentLink2URL=http://www.national.com/pf/LM/LM2576.html, ComponentLink3Description="TS5B Package Page", ComponentLink3URL=http://www.national.com/packaging/folders/ts5b.html, CompType=Switcher, DatasheetVersion=Aug-2004, PackageDescription="TO-263, Molded, .400 x .390 x .180in, 5 Lead, .067in Pitch, Surface Mount", PackageReference=TS5B, PackageVersion="revD, Apr-2005", PinCount=5, RevisionNote="Component URLs added", RoHS=N
U5: library part ESP-07_Wifi
U6 U9 U12: library part CMP-0055-00776-3, "Low Power Dual Operational Amplifier, 8-pin Narrow SOIC", Manufacturer="Texas Instruments", Package Reference=D0008A, PackageTopMarking=NSZXTT*LM*2904M, PowerWise=N, Code_IPC=SOIC127P600-8, Code_JEDEC=MS-012-AA, ComponentLink1Description="Datasheet URL", ComponentLink1URL=http://www.ti.com/general/docs/lit/getliterature.tsp?genericPartNumber=LM2904-N&fileType=pdf, CompType=Amplifiers, PackageDescription="SOIC Narrow, 4.9 x 3.9 x 1.45mm, 8 Lead, 1.27mm Pitch", PinCount=8, RoHS=N
U10: library part CMP-0237-00161-1, "STM32 ARM-based 32-bit MCU Performance Line with 128 kB Flash, 20 kB Internal RAM, -40 to +105°C Temperature, 64-Pin LQFP, Tray", ComponentLink1Description="STM32F103 Datasheet", ComponentLink1URL=http://www.st.com/internet/com/TECHNICAL_RESOURCES/TECHNICAL_LITERATURE/DATASHEET/CD00161566.pdf, ComponentLink2Description="STM32 Family Web Page", ComponentLink2URL=www.st.com/stm32, ComponentLink3Description="st.com Home", ComponentLink3URL=http://www.st.com/internet/com/home/home.jsp, DatasheetVersion="rev13.0, Apr-2011", PackageDescription="64-Pin Low-Profile Quad Flat Pack, 10 x 10 mm Body, 0.5 mm Pitch (LQFP64)", PackageReference=LQFP64, PackageVersion="rev13, Apr-2011"
U17: "Audio Amplifier"
U? U?: library part CMP-0944-00132-1, "Low-Power, Single-Supply, CMOS Instrumentation Amplifier, -55 to 125 degC, 14-pin SOP (PW14), Green (RoHS & no Sb/Br)", Input Bias Current (+/-)(Max)(nA)=0.01, Manufacturer="Texas Instruments", Quiescent Current (+/-)(Typ)(mA)=0.415, CMRR(Min)(dB)=60, Code_JEDEC=MO-153, ComponentLink1Description="Manufacturer URL", ComponentLink1URL=http://www.ti.com/, ComponentLink2Description=Datasheet, ComponentLink2URL=http://www.ti.com/general/docs/lit/getliterature.tsp?genericPartNumber=INA2332&fileType=pdf, ComponentLink3Description="Package Specification", ComponentLink3URL=http://www.ti.com/litv/pdf/mpds360, DatasheetVersion=SBOS216B, Eco-Plan="Green (RoHS & no Sb/Br)", Gain(V/V)="5 to 1000", Input Offset (+/-)(Max)(uV)=8000, Mounting Technology="Surface Mount", Noise at 1kHz(Typ)(nV/rt(Hz))=46, Non-Linearity (+/-)(Max)(%)=0.01, Number of Channels=2, PackageDescription="14-Pin Plastic Small Outline, Body 5 x 4.4 mm, Pitch 0.65 mm", PackageReference=PW14, PackageVersion="4040064-3/G, 02/2011", PartId=1, PartNumber=INA2332AIPWRG4, SubFamily="Single Supply", Vs(Max)(V)=5.5, Vs(Min)(V)=2.7
Y1: "Crystal Oscillator", LatestRevisionDate=17-Jul-2002, LatestRevisionNote="Re-released for DXP Platform.", PackageDescription="Crystal, Thru-Hole; 2 Leads; Body 3.1 x 8.2 mm (Dia.xH)", PackageReference=R38, Published=8-Jun-2000, Publisher="Altium Limited"
L1 L2 L3: Code_IEC=1005, Code_JEITA=0402, LatestRevisionDate=29-May-2009, LatestRevisionNote="IPC-7351 Footprint Added.", PackageDescription="Chip Inductor", PackageReference=0402-A, Published=8-Jun-2000, Publisher="Altium Limited"

## Free pads (board coordinates)
  round 78.74 hole 78.74: 0(690,-1970) 0(820,-975) 0(1770,-2210) 0(2340,-655) 0(2880,-3150) 0(3220,-110) 0(3562,-1666)

## Via types
v1: diameter 16, hole 8, Top Layer to Bottom Layer, tented both sides, 1 vias

## Nets (pads, with @x,y where several pads share a name; then routed paths per layer and width w, separated by ;. In a path a pad name is that pad's centre, name@x,y a point inside that pad or via, vN(x,y) a via of type N, cw(c..) or ccw(c..) an arc to the next point about the centre after c; other vN are vias at no path point)
+3.3V: C10.1 C11.1 C13.1 C14.1 C18.2 C19.2 C27.2 C28.2 C37.1 C38.1 C43.1 C44.1 P12.1 R6.2 R11.2 R15.2 R19.2 R24.2 R25.2 R29.2 R30.2 R34.2 R35.2 R38.2 R39.2 R48.8 R57.1 R64.1 U4.4 U5.1 U5.8 U7.3 U8.1 U8.14 U10.13 U10.19 U10.32 U10.48 U10.64
+5V: C3.2 C6.1 C45.1 C46.1 C47.1 C49.1 C50.1 D6.2 D8.2 D9.2 D12.2 D14.2 D16.2 L2.2 L3.2 LS1.1 P7.1 P8.10 P13.1 R1.1 R10.1 R13.1 R17.1 U1.1 U1.2 U4.3 U6.8 U9.8 U12.8 U17.5
+12V: C4.1 C5.1 C7.1 C9.1 C12.1 CB1.2 D1.2 D3.2 D5.2 P2.1 P4.1 P6.1 P9.1 R4.2 U3.1
AD_IN: C17.2 D6.1 D7.2 R26.1 U10.17
AD_OUT: C15.2 P5.2 R27.2
ADS_IN: C26.2 D9.1 D11.2 R32.1 U10.50
ADS_OUT: C24.2 P5.1 R36.2 R64.2
ALCOHOL_C: R5.1 U1.6 U10.24
AUDIO: C1.1 U10.20
BEE: R14.2 U10.38
CS_SD: R2.1 U10.55
DEBUG_RX: R63.2 U10.43
DEBUG_TX: R56.2 U10.42
E2_SCL: R48.6 U10.25
E2_SDA: R48.5 U10.26
FAN: R15.1 R16.1 R43.2 U10.28
FHD_IN: C31.2 D12.1 D13.2 R40.1 U10.14
FHD_OUT: C19.1 C29.2 P10.1 R35.1 R41.2
FIRE_TEM_D: U10.8
FIRE_TEM_T: U10.9
FIRE_UP: R11.1 R12.1 U10.10
FLD_IN: C23.2 D8.1 D10.2 R31.1 U10.11
FLD_OUT: C18.1 C21.2 P10.2 R33.2 R34.1
IO1: R61.1 U10.58
IO2: R61.2 U10.59
IO3: R61.3 U10.61
IO4: R61.4 U10.62
LDHD_IN: C42.2 D16.1 D17.2 R58.1 U10.23
LDHD_OUT: C28.1 C40.2 P11.1 R39.1 R59.2
LDLD_IN: C36.2 D14.1 D15.2 R49.1 U10.22
LDLD_OUT: C27.1 C34.2 P11.2 R38.1 R50.2
M6_CLK: U2.5 U10.41
M6_DATA: U2.4 U10.21
MMA_SCL: R29.1 U8.4 U10.57
MMA_SDA: R30.1 U8.6 U10.56
NetC1_2: C1.2 U2.1
NetC2_1: C2.1 R46.1
NetC2_2: C2.2 U2.2
NetC4_2: C4.2 C5.2 D1.1 P2.2 Q1.2
NetC8_1: C8.1 L1.2 L3.1 U3.4
NetC9_2: C9.2 D3.1 P6.2 Q6.2
NetC12_2: C12.2 D5.1 P9.2 Q8.2
NetC16_2: C16.2 R27.1 U6.3
NetC20_2: C20.2 U8.2
NetC22_2: C22.2 R33.1 U9.3
NetC25_2: C25.2 R36.1 U6.5
NetC30_2: C30.2 R41.1 U9.5
NetC32_1: C32.1 U10.5 Y1.2
NetC33_1: C33.1 U10.6 Y1.1
NetC35_2: C35.2 R50.1 U12.3
NetC39_2: C39.2 R57.2 S2.2 U10.7
NetC41_2: C41.2 R59.1 U12.5
NetC?_1: C?.1 U17.3
NetC?_2: C?.2 R9.2
NetCB1_1: CB1.1 J?.1 J?.1A J?.1B
NetD2_1: D2.1 R4.1
NetD4_2: D4.2 L1.1 U3.2
NetL2_1: L2.1 U2.6
NetLS1_2: LS1.2 Q5.3
NetP3_1: P3.1 U17.7
NetP3_2: P3.2 U17.6
NetP4_2: P4.2 Q3.2
NetP7_2: P7.2 R60.8
NetP7_3: P7.3 R60.7
NetP7_4: P7.4 R60.6
NetP7_5: P7.5 R60.5
NetP8_3: P8.3 R62.1
NetP8_4: P8.4 R18.1
NetP8_6: P8.6 R20.1
NetP8_7: P8.7 R21.1
NetP8_8: P8.8 R23.1
NetP10_3: P10.3 P11.3 P14.2
NetP12_2: P12.2 R47.1
NetP12_3: P12.3 R55.1
NetP13_2: P13.2 R56.1
NetP13_3: P13.3 R63.1
NetQ1_1: Q1.1 Q2.3 R1.2
NetQ2_1: Q2.1 R7.2
NetQ3_1: Q3.1 Q4.3 R10.2
NetQ4_1: Q4.1 R12.2
NetQ5_1: Q5.1 R14.1
NetQ6_1: Q6.1 Q7.3 R13.2
NetQ7_1: Q7.1 R16.2
NetQ8_1: Q8.1 Q9.3 R17.2
NetQ9_1: Q9.1 R22.2
NetR2_2: R2.2 U17.1
NetR8_2: R8.2 U17.2
NetR24_1: R24.1 U5.3
NetR26_2: R26.2 U6.1 U6.2
NetR28_1: R28.1 U5.10
NetR31_2: R31.2 U9.1 U9.2
NetR32_2: R32.2 U6.6 U6.7
NetR37_2: R37.2 U8.7
NetR40_2: R40.2 U9.6 U9.7
NetR46_2: R46.2 U17.4
NetR49_2: R49.2 U12.1 U12.2
NetR54_2: R54.2 U10.60
NetR58_2: R58.2 U12.6 U12.7
PGND: C3.1 C6.2 C7.2 C8.2 C15.1 C16.1 C17.1 C21.1 C22.1 C23.1 C24.1 C25.1 C26.1 C29.1 C30.1 C31.1 C34.1 C35.1 C36.1 C40.1 C41.1 C42.1 C45.2 C46.2 C47.2 C49.2 C50.2 D2.2 D4.1 D7.1 D10.1 D11.1 D13.1 D15.1 D17.1 J?.2 J?.2A J?.2B J?.3 J?.3A J?.3B P5.3 P7.7 P8.2 P8.11 Q1.3 Q3.3 Q5.2 Q6.3 Q8.3 R3.1 R5.2 R8.1 R9.1 U1.5 U2.3 U3.3 U3.5 U6.4 U9.4 U12.4 U17.8
PUMP1: R19.1 R22.1 U10.15
PUMP2: R6.1 R7.1 U10.16
SGND: C10.2 C11.2 C13.2 C14.2 C20.1 C32.2 C33.2 C37.2 C38.2 C39.1 C43.2 C44.2 P12.4 P13.4 Q2.2 Q4.2 Q7.2 Q9.2 R3.2 R28.2 R37.1 R43.1 R48.1 R48.2 R48.3 R48.4 R48.7 R54.1 S1.9 S1.10 S1.11 S1.12 S1.13 S1.14 S1.15 S1.16 S2.1 U4.1 U5.9 U7.1 U8.5 U8.10 U8.12 U10.12 U10.18 U10.31 U10.47 U10.63
SR_D0: R20.2 U10.35
SR_D1: R21.2 U10.36
SR_D2: R23.2 U10.37
SR_LED: R62.2 U10.33
SR_SW: R18.2 U10.34
SW1: S1.1 U10.51
SW2: S1.2 U10.52
SW3: S1.3 U10.53
SW4: S1.4 U10.54
SW5: S1.5 U10.45
SW6: S1.6 U10.44
SW7: S1.7 U10.40
SW8: S1.8 U10.39
SWCLK: R55.2 U10.49
SWDIO: R47.2 U10.46
TEM: R25.1 U7.2 U10.27
WIFI_RX: U5.15 U10.29
WIFI_TX: U5.16 U10.30
pads on no net: P7.6 P8.1 P8.5 P8.9 P14.1 P15.1 P15.2 R60.1 R60.2 R60.3 R60.4 R61.5 R61.6 R61.7 R61.8 U1.3 U1.4 U2.7 U2.8 U3.6 U4.2 U5.2 U5.4 U5.5 U5.6 U5.7 U5.11 U5.12 U5.13 U5.14 U8.3 U8.8 U8.9 U8.11 U8.13 U8.15 U8.16 U10.1 U10.2 U10.3 U10.4 U?.1 U?.2 U?.3 U?.4 U?.5 U?.6 U?.7 U?.8 U?.9 U?.10 U?.11 U?.12 U?.13 U?.14 U?.15 U?.16
copper on no net: | length 124.4
  Top Layer w10: v1(3030,-2185) 3072.52,-2185
  Bottom Layer w10: 1594,-1892.98 1626,-1860.98 ; 2995.43,-2180 3000.43,-2185 v1(3030,-2185)

## Keep-outs
Keep-Out Layer:
  the board outline again, w6

## Silkscreen, mask and mechanical layers (free items; w line width, h text height)
Top Overlay:
  lines w6: 2746,-2474 2902,-2474 2828,-2400 3010.98,-2400
  text "RX" at 3410,-1210 h30
  text "TX" at 3410,-1310 h30
  text "3.3V" at 3740,-1440 h30
Bottom Overlay:
  text "ArtFire" at 4170,-3140 h200
  text "V0.7" at 4170,-3300 h200

## Text inside footprints (layer, text, board x,y; h text height)
J?: Mechanical 1 "Mech 2 - Clearance, move to internal plane if present" at 85.98,-159.93 h11.81; Mechanical 1 "Mech 1 - Slot cut-out" at 85.98,-140.24 h11.81; Mechanical 1 "Assign keep-out area to slot" at 85.98,-100.87 h11.81; Mechanical 1 "Alert PCB fab to slot details" at 85.98,-120.56 h11.81
P8: Top Overlay "ANT" at 3840,-3590 h196.85 r270
S1: Top Overlay "ON" at 4091.81,-899.13 h39.37 r270; Top Overlay "1" at 3800.47,-920 h39.37 r270; Top Overlay "8" at 3800.47,-1355.83 h39.37 r270